# Altium PCB Base.PcbDoc
Units mm, origin at the board's own origin, x right, y up, seen from the top; angles counter-clockwise.
Board outline 38 x 18.7 mm, 2 copper layers (Top Layer, Bottom Layer), stack 1.671 mm thick; 41 components, 35 nets, 177 pads, 47 vias.
Unrouted connection lines stored in the file: 1.
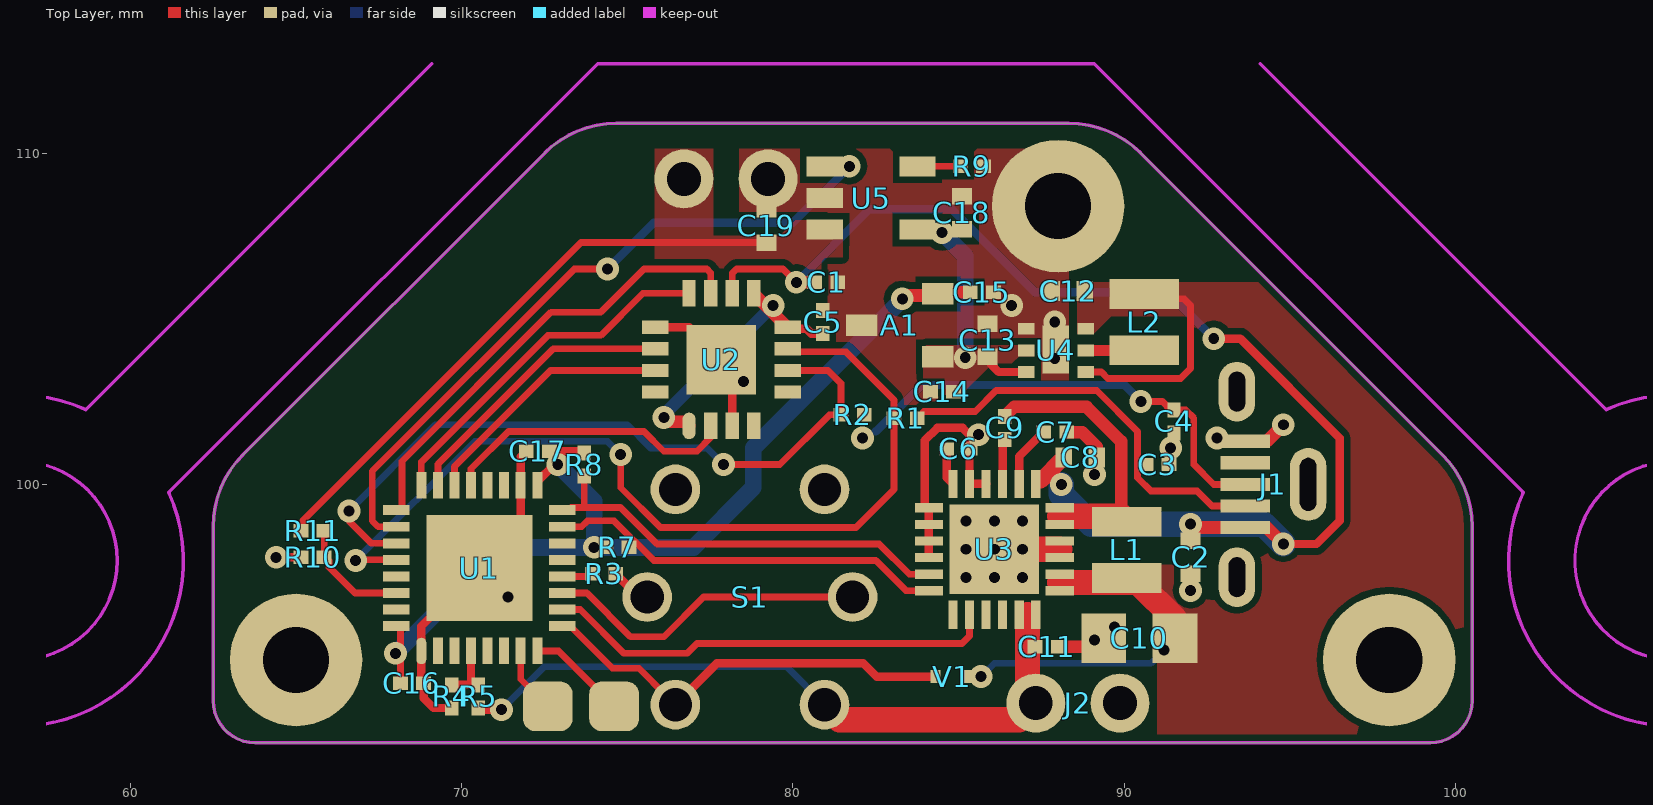
[diagram p0: Top Layer view]
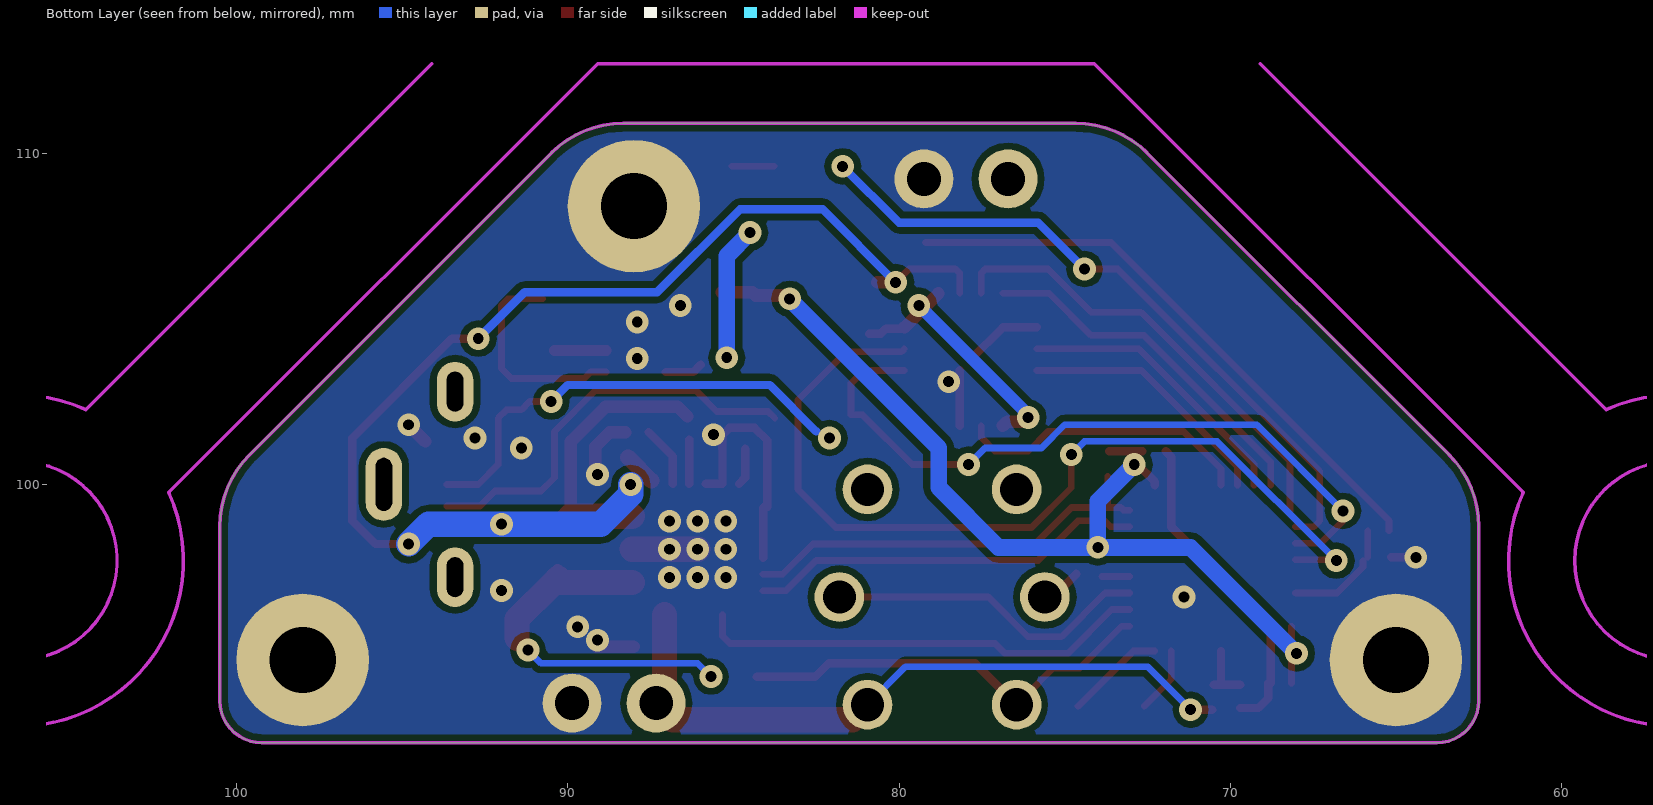
[diagram p1: Bottom Layer view, seen from below]

## Layer stack, top to bottom
Top Layer: signal copper 0.0356
Dielectric: core 1.6, FR-4, Dk 4.8
Bottom Layer: signal copper 0.0356

## Board outline
62.5,93.47 62.5,98.73 cw(c65.566,98.73) 63.398,100.898 72.502,110.002 cw(c74.67,107.834) 74.67,110.9 88.33,110.9 cw(c88.33,107.834) 90.498,110.002 99.602,100.898 cw(c97.434,98.73) 100.5,98.73 100.5,93.47 cw(c99.23,93.47) 99.23,92.2 63.77,92.2 cw(c63.77,93.47)

## Design rules (kind name [scope] priority, off if disabled: settings)
Clearance [All] p1: gap=0.2
PolygonConnect [All] p1: connectstyle=Direct reliefconductorwidth=0.254 reliefentries=4 polygonreliefangle="90 Angle"
RoutingVias [All] p1: holewidth=0.711 width=1.27 viastyle="Through Hole" minholewidth=0.711 minwidth=1.27 maxholewidth=0.711 maxwidth=1.27
SilkscreenOverComponentPads [All] p1: minsilkscreentomaskgap=0.254
SolderMaskExpansion [All] p1: expansion=0.102
Width [All] p1: maxlimit=2.54 minlimit=0.2 preferedwidth=0.203
27 further rules are at their usual default settings.

## Components (designator, comment, footprint, x,y, rotation, side; value= is the part's Value field where it differs from the comment)
A1 "AP7313-33SA" SOT23 84.375,103.85 r180 top
C1 "Cap 100nF" "0201 (C)" 81,106.1 r0 top
C2 "Cap 4.7µF" "0402 (C)" 92,97.8 r270 top
C3 "Cap 47pF" "0201 (C)" 91,100.6 r0 top
C4 "Cap 47pF" "0201 (C)" 91.5,101.9 r270 top
C5 "Cap 100nF" "0201 (C)" 80.9,104.9 r90 top
C6 "Cap 1µF" "0201 (C)" 84.991,101.07 r180 top
C7 "Cap 1µF" "0201 (C)" 87.912,101.578 r180 top
C8 "Cap 2.2µF" "0402 (C)" 88.674,100.816 r180 top
C9 "Cap 33nF" "0201 (C)" 86.388,101.705 r90 top
C10 "Cap 22µF" "0805 (C)" 90.452,95.355 r180 top
C11 "Cap 1µF" "0201 (C)" 87.658,95.101 r0 top
C12 "Cap 2.2µF" "0402 (C)" 88.306,105.836 r180 top
C13 "Cap 4.7µF" "0402 (C)" 85.875,104.35 r90 top
C14 "Cap 1µF" "0201 (C)" 84.5,102.8 r180 top
C15 "Cap 1µF" "0201 (C)" 85.7,105.8 r0 top
C16 "Cap 100nF" "0201 (C)" 68.5,94 r0 top
C17 "Cap 100nF" "0201 (C)" 72.3,101 r0 top
C18 "Cap 4.7µF" "0402 (C)" 85.1,108.2 r90 top
C19 "Cap 4.7µF" "0402 (C)" 79.2,107.8 r90 top
J1 "USB" "MICRO USB RECEPTACLE VERTICAL" 93.4,100 r90 top
J2 "Battery" "Conn 2-Pos 2.54mm Pitch" 88.6,93.4 r0 top
L1 "L 1µH" "INDUCTOR 2X2.5MM" 90.071,98.022 r270 top
L2 "L 1µH" "INDUCTOR 2X2.5MM" 90.6,104.9 r90 top
R1 "Res 27R" "0201 (R)" 83.4,102 r180 top
R2 "Res 27R" "0201 (R)" 81.8,102.1 r180 top
R3 "Res 100R" "0201 (R)" 74.3,97.3 r180 top
R4 "Res 10k" "0201 (R)" 69.7,93.6 r90 top
R5 "Res 10k" "0201 (R)" 70.5,93.6 r270 top
R7 "Res 4k7" "0201 (R)" 74.7,98.1 r0 top
R8 "Res 4k7" "0201 (R)" 73.7,100.6 r270 top
R9 "Res 2k2" "0201 (R)" 85.4,109.6 r180 top
R10 "Res 10k" "0201 (R)" 65.5,97.8 r180 top
R11 "Res 10k" "0201 (R)" 65.5,98.6 r180 top
S1 "ITS13FV1" "SWITCH THROUGH-HOLE" 78.7,96.6 r0 top
U1 "Xmega32E5" "QFN-32 (5X5MM)" 68.782,94.972 r90 top
U2 "FT230X" "QFN-16 (4X4MM)" 76.864,101.766 r90 top
U3 "bq24250" "QFN-24 (4X4MM)" 84.102,99.292 r0 top
U4 "FAN4860UMP5X" 6-UMLP 87.036,104.693 r0 top
U5 "MCP73831" SOT-23-5 80.958,109.594 r0 top
V1 "1N4148W" SOD923 84.8,94.2 r180 top

## Footprints (in the part's own frame and the unit in brackets; to place one, negate y for a bottom-side part, rotate by r counter-clockwise, add the part's x,y. Pads: shape width x height; smd on the part's side, far side on the other; paste and mask are expansions set on the pad)
6-UMLP [mm]
  rect 0.5x0.35 smd: 1(0,0) 2(0,-0.65) 3(0,-1.3) 4(1.8,-1.3) 5(1.8,-0.65) 6(1.8,0)
  rect 0.8x1.45 smd: 1(0.9,-0.625)
  body extent -0.1,-1.65 1.9,0.35, height 0.55
"0201 (C)" [mm]
  rect 0.45x0.4 smd: 1(-0.35,0) 2(0.35,0)
  body extent -0.35,-0.15 0.35,0.15, height 0.3
"0201 (R)" [mm]
  rect 0.45x0.4 smd: 1(-0.35,0) 2(0.35,0)
  body extent -0.35,-0.15 0.35,0.15, height 0.3
"0402 (C)" [mm]
  rect 0.5x0.6 smd: 1(-0.5,0) 2(0.5,0)
  body extent -0.5,-0.25 0.5,0.25, height 0.41
"0805 (C)" [mm] "Chip Resistor, 2-Leads, Body 2.0x1.3mm, IPC Low Density"
  rect 1.35x1.5 smd: 1(-1.075,0) 2(1.075,0)
  body extent -1.07,-0.7 1.08,0.7, height 1
"Conn 2-Pos 2.54mm Pitch" [mil]
  round 70 hole 40: 1(-50,0) 2(50,0)
  body extent -100,126 100,254, height 256
"INDUCTOR 2X2.5MM" [mm]
  rect 0.9x2.1 smd: 1(-0.85,0) 2(0.85,0)
  body extent -1.25,-1 1.25,1, height 1.2
"MICRO USB RECEPTACLE VERTICAL" [mm]
  rect 0.4x1.5 smd: 1(-1.3,-0.25) 2(-0.65,-0.25) 3(0,-0.25) 4(0.65,-0.25) 5(1.3,-0.25)
  oval 1.8x1.1 hole 0.5 slot 1.2 at 0 deg: ""(-2.8,0) ""(2.8,0)
  oval 2.2x1.1 hole 0.5 slot 1.6 at 0 deg: ""(0,-2.15)
  body extent -4,-2.6 4,0.4, height 6.7
"QFN-16 (4X4MM)" [mm]
  oval 0.8x0.4 smd: 1(0,0)
  rect 0.8x0.4 smd: 2(0,-0.65) 3(0,-1.3) 4(0,-1.95) 9(4,-1.95) 10(4,-1.3) 11(4,-0.65) 12(4,0)
  rect 0.4x0.8 smd: 5(1.025,-2.975) 6(1.675,-2.975) 7(2.325,-2.975) 8(2.975,-2.975) 13(2.975,1.025) 14(2.325,1.025) 15(1.675,1.025) 16(1.025,1.025)
  rect 2.1x2.1 smd: 17(2,-0.975)
  body extent 0,-2.97 4,1.03, height 0.85
"QFN-24 (4X4MM)" [mm]
  rect 0.85x0.28 smd: 1(0,0) 2(0,-0.5) 3(0,-1) 4(0,-1.5) 5(0,-2) 6(0,-2.5) 13(3.95,-2.5) 14(3.95,-2) 15(3.95,-1.5) 16(3.95,-1) 17(3.95,-0.5) 18(3.95,0)
  rect 2.7x2.7 smd: 4(1.975,-1.25)
  rect 0.28x0.85 smd: 7(0.725,-3.225) 8(1.225,-3.225) 9(1.725,-3.225) 10(2.225,-3.225) 11(2.725,-3.225) 12(3.225,-3.225) 19(3.225,0.725) 20(2.725,0.725) 21(2.225,0.725) 22(1.725,0.725) 23(1.225,0.725) 24(0.725,0.725)
  body extent -0.02,-3.25 3.98,0.75, height 1
"QFN-32 (5X5MM)" [mm]
  rect 3.2x3.2 smd: 0(2.5,-1.75)
  oval 0.8x0.3 smd: 1(0,0)
  rect 0.8x0.3 smd: 2(0,-0.5) 3(0,-1) 4(0,-1.5) 5(0,-2) 6(0,-2.5) 7(0,-3) 8(0,-3.5) 17(5,-3.5) 18(5,-3) 19(5,-2.5) 20(5,-2) 21(5,-1.5) 22(5,-1) 23(5,-0.5) 24(5,0)
  rect 0.3x0.8 smd: 9(0.75,-4.25) 10(1.25,-4.25) 11(1.75,-4.25) 12(2.25,-4.25) 13(2.75,-4.25) 14(3.25,-4.25) 15(3.75,-4.25) 16(4.25,-4.25) 25(4.25,0.75) 26(3.75,0.75) 27(3.25,0.75) 28(2.75,0.75) 29(2.25,0.75) 30(1.75,0.75) 31(1.25,0.75) 32(0.75,0.75)
  body extent 0,-4.25 5,0.75, height 0.55
SOD923 [mm]
  rect 0.3x0.4 smd: A(0.5,0) K(-0.5,0)
  body extent -0.42,-0.3 0.43,0.3, height 0.38
SOT23 [mm]
  rect 0.95x0.65 smd: 1(0,0) 2(0,-1.9) 3(2.3,-0.95)
  body extent -0.05,-2.4 2.35,0.5, height 1.3
SOT-23-5 [mm]
  rect 1.1x0.6 smd: 1(0,0) 2(0,-0.95) 3(0,-1.9) 4(2.8,-1.9) 5(2.8,0)
  body extent 0,-2.47 2.8,0.58, height 1.4
"SWITCH THROUGH-HOLE" [mm]
  round 1.5 hole 1: 1(2.25,3.25) 2(2.25,-3.25) 3(-2.25,3.25) 4(-2.25,-3.25) L1(3.1,0) L2(-3.1,0)
  body extent -3.97,-3.99 4,3.99, height 11.95

## Part data
A1: "Low Dropout Regulator 3.3V, 150mA"
C1 C5 C16 C17: "Ceramic Capacitor 100nF"
C2 C13 C18 C19: "Ceramic Capacitor 4.7µF"
C3 C4: "Ceramic Capacitor 47pF"
C6 C7 C11 C14 C15: "Ceramic Capacitor 1µF"
C8 C12: "Ceramic Capacitor 2.2µF"
C9: "Ceramic Capacitor 33nF"
C10: "Ceramic Capacitor 22µF"
J1: library part "Micro USB", "Micro USB Type B Receptacle"
J2: library part "Connector 2-Pos", "Connector 2-Pos 2.54mm Pitch"
L1 L2: "Inductor 1µH"
R1 R2: "Resistor 27R"
R3: "Resistor 100R"
R4 R5 R10 R11: "Resistor 10k"
R7 R8: "Resistor 4k7"
R9: "Resistor 2k2"
S1: "Through-Hole Tactile Switch"
U1: "8-Bit AVR Microcontroller"
U2: "USB-UART Bridge"
U3: "LiPo Chargering Regulator with Step-Down Converter"
U4: "Boost Converter 5V"
U5: "500mA Linear LiPo Charger"
V1: library part Diode, "Diode"

## Free pads (board coordinates)
  round 4 hole 2 unplated: ""(65,94.7) ""(88,108.4) ""(98,94.7)
  rrect50% 1.5x1.5 smd: ""(72.6,93.3) ""(74.6,93.3)
  round 1.778 hole 1.016: ""(76.708,109.22) ""(79.248,109.22)

## Via types
v1: diameter 0.686, hole 0.33, Top Layer to Bottom Layer, tented both sides, 47 vias

## Nets (pads, with @x,y where several pads share a name; then routed paths per layer and width w, separated by ;. In a path a pad name is that pad's centre, name@x,y a point inside that pad or via, vN(x,y) a via of type N, cw(c..) or ccw(c..) an arc to the next point about the centre after c; other vN are vias at no path point)
+3.3V: A1.2 C15.1 C16.1 C17.2 R7.1 R8.1 U1.17 U1.32 | length 28.9
  Top Layer w0.203: C16.1 U1.32@68.15,95.722
  Top Layer w0.254: U1.17 72.282,100.082 v1@72.8,100.6 ; C17.2 R8.1@73.65,101
  Top Layer w0.381: v1@83.4,105.7 84.325,105.7 A1.2 ; A1.2@84.425,105.8 C15.1
  Bottom Layer w0.508: v1(68,94.9) 71.2,98.1 v1(74,98.1) ; v1(72.9,100.6) 74,99.5 v1(74,98.1) ; v1(83.3,105.6) 78.8,101.1 78.8,99.9 77,98.1 v1(74,98.1)
+5V: A1.1 C13.1 C14.1 C18.1 U4.2 U4.3 U5.4 | length 5.2
  Top Layer w0.254: C13.1@85.987,103.613 86.207,103.393 U4.3
  Bottom Layer w0.508: v1(84.5,107.6) 85.2,106.9 v1(85.2,103.825)
GND: A1.3 C1.2 C2.2 C3.2 C4.2 C5.2 C6.1 C7.1 C8.1 C10.2 C11.2 C12.2 C13.2 C14.2 C15.2 C16.2 C17.1 C18.2 C19.2 J1.5 J2.2 pad.@65,94.7 pad.@79.248,109.22 pad.@88,108.4 pad.@98,94.7 R4.1 R9.1 R10.2 U1.0 U1.1 U1.18 U2.3 U2.13 U2.17 U3.1 U3.2 U3.3 U3.4 U3.15 U3.16 U3.22 U3.23 U4.1 U5.2 | length 27.8
  Top Layer w0.254: v1(64.4,97.8) R10.2 ; C16.2@68.782,94 U1.1 68.782,95.722 U1.0 71.782,98.722 U1.18 71.782,100.832 C17.1 ; C16.2 68.85,93.55 69.15,93.25 R4.1 ; U2.13 76.864,104.741 U2.17 ; U2.3 U2.17@78.164,103.441 ; U3.1@83.975,99.305 83.975,101.324 84.356,101.705 85.118,101.705 85.341,101.482 C6.1 ; U3.1@84.089,99.305 U3.1 U3.2 U3.3 U3.4@84.102,97.792 ; C6.1@85.327,101.056 U3.23 U3.22 ; U3.15 88.052,98.042 U3.16
  Top Layer w0.381: C11.2 C10.2@89.123,95.101 ; C7.1 88.728,101.578 89.174,101.132 C8.1 v1@89.174,100.374 ; J1.5@94.3,101.3 v1(94.8,101.8)
  Top Layer w0.762: v1(86.077,98.042) 88.052,98.042
  other v1: 89.1,95.3 89.7,95.7 71.4,96.6 92,96.8 85.227,97.192 86.077,97.192 86.927,97.192 85.227,98.042 86.927,98.042 85.227,98.892 86.077,98.892 86.927,98.892 89.1,100.3 91.4,101.1 92.8,101.4 85.6,101.5 78.5,103.1 87.9,103.8 87.9,104.9 86.6,105.4
NetC3_1: C3.1 J1.2 R1.1 | length 12.5
  Top Layer w0.203: R1.1 83.95,102.2 85.5,102.2 86.132,102.832 89.168,102.832 90.4,101.6 90.4,100.2 90.8,99.8 92.2,99.8 92.65,99.35 J1.2
NetC4_1: C4.1 J1.3 R2.1 | length 13.8
  Top Layer w0.203: v1(90.5,102.5) 91.15,102.5 91.4,102.25 91.85,102.25 92.1,102 92.1,100.6 92.7,100 J1.3
  Bottom Layer w0.254: 82.5,101.6 83.9,103 90,103 v1(90.5,102.5)
  other v1: 82.1,101.4
NetC5_1: C5.1 U2.1 U2.8 U2.9 | length 7.9
  Top Layer w0.254: U2.8@79.88,104.7 80.4,104.7 80.55,104.55 C5.1
  Top Layer w0.381: v1@76.229,101.893 76.737,101.893 U2.1 ; U2.9 U2.8
  Bottom Layer w0.381: v1@76.061,102.061 v1(79.4,105.4)
  other v1: 76.102,102.02
NetC6_2: C6.2 U3.24 | length 1.1
  Top Layer w0.254: C6.2 84.641,100.203 U3.24
NetC7_2: C7.2 U3.20 | length 1.9
  Top Layer w0.254: U3.20 86.827,100.843 C7.2
NetC9_1: C9.1 U3.21 | length 1.3
  Top Layer w0.254: U3.21 C9.1@86.327,101.355
NetC9_2: C9.2 L1.1 U3.17 U3.18 | length 8.9
  Top Layer w0.254: U3.17 88.052,99.038 U3.18
  Top Layer w0.381: C9.2 86.673,102.34 88.86,102.34 89.905,101.295 L1.1@89.905,99.038
  Top Layer w0.762: 88.052,99.038 89.905,99.038 L1.1
NetL2_1: L2.1 U4.5 | length 1.6
  Top Layer w0.33: U4.5 L2.1@90.392,104.043
NetR1_2: R1.2 U1.28 U2.7 | length 27.7
  Top Layer w0.203: v1@66.8,97.722 U1.28 ; v1(74.8,100.9) 74.8,99.9 76,98.7 81.9,98.7 83.05,99.85 R1.2 83.05,102.55 81.6,104 79.93,104 U2.7
  Bottom Layer w0.203: v1(66.8,97.7) 70.4,101.3 74.4,101.3 v1(74.8,100.9)
NetR2_2: R2.2 U1.27 U2.6 | length 21.5
  Top Layer w0.203: v1@66.6,98.9 67.278,98.222 U1.27 ; v1(77.9,100.6) 79.6,100.6 81.1,102.1 R2.2 81.45,103.05 81.059,103.441 U2.6
  Bottom Layer w0.203: v1(66.6,99.2) 69.2,101.8 75,101.8 75.7,101.1 77.4,101.1 v1(77.9,100.6)
NetR3_1: R3.1 S1.L2 | length 1.5
  Top Layer w0.254: R3.1 S1.L2@75.35,96.6 ; S1.L2@75.25,96.25 S1.L2
NetR3_2: R3.2 U1.12 | length 0.8
  Top Layer w0.203: U1.12 R3.2@73.872,97.222
NetR4_2: R4.2 R5.1 U1.4 | length 1.8
  Top Layer w0.254: R4.2 70.282,93.95 ; U1.4 70.282,93.95 ; R5.1 70.282,93.95
NetR7_2: R7.2 U1.15 U3.6 | length 12
  Top Layer w0.203: U1.15 73.622,98.722 73.8,98.9 74.6,98.9 75.8,97.7 82.5,97.7 83.408,96.792 U3.6
NetR8_2: R8.2 U1.16 U3.5 | length 12.9
  Top Layer w0.203: U1.16 73.222,99.222 73.303,99.303 73.7,99.303 ; R8.2 73.7,99.303 ; U3.5 83.508,97.292 82.6,98.2 75.9,98.2 74.797,99.303 73.7,99.303
NetR9_2: R9.2 U5.5 | length 1.3
  Top Layer w0.203: U5.5@83.764,109.6 R9.2
NetR10_1: R10.1 R11.1 U1.30 | length 3.4
  Top Layer w0.203: R10.1 R11.1 ; R10.1@65.998,97.698 65.998,97.502 66.778,96.722 U1.30
NetS1_4: S1.4 U1.9 V1.A | length 12.6
  Top Layer w0.203: U1.9 73.278,95.722 74.55,94.45 75.35,94.45 S1.4@76.2,93.6
  Top Layer w0.254: S1.4 77.7,94.6 82.125,94.6 82.525,94.2 V1.A
NetS1_L1: S1.L1 U1.11 | length 9.8
  Top Layer w0.203: U1.11 73.778,96.722 75.1,95.4 76.1,95.4 77.3,96.6 S1.L1
NetU1_10: U1.10 U3.8 | length 13.7
  Top Layer w0.203: U1.10 73.578,96.222 74.9,94.9 76.8,94.9 77.1,95.2 85.1,95.2 85.327,95.427 U3.8
NetU1_21: U1.21 U2.2 | length 9
  Top Layer w0.203: U1.21 70.282,100.471 71.411,101.6 75.5,101.6 76.098,101.002 77.102,101.002 77.514,101.414 U2.2
NetU1_22: U1.22 U2.15 | length 7.8
  Top Layer w0.203: U1.22 69.782,100.542 72.681,103.441 U2.15
NetU1_23: U1.23 U2.14 | length 8.6
  Top Layer w0.203: U1.23 69.282,100.612 72.761,104.091 U2.14
NetU1_24: U1.24 U2.12 | length 10.9
  Top Layer w0.203: U1.24 68.782,100.682 72.6,104.5 74.2,104.5 75.466,105.766 U2.12
NetU1_25: U1.25 U2.11 | length 13.9
  Top Layer w0.203: U1.25@68.2,99.2 68.2,100.7 72.7,105.2 74.2,105.2 75.5,106.5 77.4,106.5 77.514,106.386 U2.11
NetU1_26: U1.26 U5.1 | length 20.5
  Top Layer w0.203: U1.26 67.478,98.722 67.3,98.9 67.3,100.4 73.4,106.5 v1(74.4,106.5)
  Bottom Layer w0.254: v1(74.4,106.5) 75.8,107.9 80,107.9 v1(81.7,109.6)
PDI_CLK: pad.@74.6,93.3 U1.8 | length 3
  Top Layer w0.203: U1.8 72.928,94.972 pad.@74.6,93.3
PDI_DATA: pad.@72.6,93.3 U1.7 | length 2
  Top Layer w0.203: U1.7 71.782,94.118 pad.@72.6,93.3
V_BAT: C11.1 J2.1 R5.2 S1.2 U3.11 U3.12 | length 21.4
  Top Layer w0.254: R5.2@70.55,93.2 v1(71.2,93.2) ; U3.11 87.077,96.067 U3.12
  Top Layer w0.762: S1.2 81.4,92.9 86.83,92.9 J2.1 ; J2.1@87.077,93.4 87.077,96.067
  Bottom Layer w0.203: v1(71.2,93.2) 72.5,94.5 79.8,94.5 S1.2
V_DEVICE: C19.1 pad.@76.708,109.22 R11.2 U5.3 | length 17.8
  Top Layer w0.203: R11.2@65.212,98.6 65.212,98.912 73.6,107.3 C19.1
V_SYS: C10.1 C12.1 L1.2 L2.2 U3.13 U3.14 U4.4 U4.6 V1.K | length 18
  Top Layer w0.203: U4.4 89.307,103.393 89.5,103.2 91.7,103.2 92,103.5 92,105.4 91.8,105.6 L2.2@90.75,105.6
  Top Layer w0.254: U3.13 88.052,97.042 U3.14
  Top Layer w0.381: L1.2 L1.2@90.299,97.4
  Top Layer w0.762: 88.052,97.042 L1.2@90.416,97.042 ; L1.2@90.286,97.172 L1.2@90.416,97.042 ; C10.1 91.527,95.931 L1.2@90.416,97.042
  Bottom Layer w0.203: v1(85.675,94.2) 86.075,94.6 90.8,94.6 v1(91.2,95)
V_USB: C1.1 C2.1 C8.2 J1.1 U2.10 U3.19 | length 39.4
  Top Layer w0.203: U2.10 78.164,106.364 78.3,106.5 79.7,106.5 v1(80.1,106.1)
  Top Layer w0.254: v1(92.7,104.4) 93.5,104.4 96.5,101.4 96.5,98.9 95.8,98.2 v1(94.8,98.2)
  Top Layer w0.381: v1(80.1,106.1) C1.1 ; v1@92,98.7 J1.1 ; J1.1@94.3,98.7 v1(94.8,98.2)
  Top Layer w0.483: 87.471,100.113 C8.2 ; 87.758,100.342 v1(88.1,100)
  Bottom Layer w0.254: v1(80.1,106.1) 82.3,108.3 84.8,108.3 87.3,105.8 91.3,105.8 v1(92.7,104.4)
  Bottom Layer w0.762: v1(88.1,100) 88.1,99.7 89,98.8 v1(92,98.8) 94.2,98.8 v1(94.8,98.2)
pads on no net: J1. J1.4 S1.1 S1.3 U1.2 U1.3 U1.5 U1.6 U1.13 U1.14 U1.19 U1.20 U1.29 U1.31 U2.4 U2.5 U2.16 U3.7 U3.9 U3.10

## Polygon pours and split planes (outlines as drawn)
GND on Top Layer "Bottom Layer-No Net" (solid, remove dead copper, pour order 6): 88.325,101.85 88.325,110.125 78.375,110.125 78.375,108.225 81.05,108.225 81.05,101.85
V_DEVICE on Top Layer "Bottom Layer-No Net" (solid, remove dead copper, pour order 12): 81.5,107.975 81.5,106.4 75.825,106.4 75.825,110.125 77.6,110.125 77.6,107.5 79.6,107.5 80.075,107.975
V_SYS on Top Layer "Bottom Layer-No Net" (solid, remove dead copper, pour order 2): 88.575,104.55 88.575,106.1 100.5,106.1 100.5,92.225 91,92.2 91,97.575 93.4,97.575 93.4,103.575 92,103.575 92,105.075 89.6,105.075 89.075,104.55
+5V on Top Layer "Bottom Layer-No Net" (solid, remove dead copper, pour order 4): 87.275,104.2 87.275,103.875 86.825,103.875 86.6,103.65 86.025,103.65 85.075,102.7 83.925,102.7 83.925,104.2
GND on Bottom Layer "Bottom Layer-No Net" (solid, remove dead copper, pour order 7): 62.5,92.2 100.5,92.2 100.5,100 89.6,110.9 73.4,110.9 62.5,100

## Keep-outs
Keep-Out Layer:
  circle w0.102: c106.6,97.7 r3
  circle w0.102: c56.6,97.7 r3
  lines w0.102: 58.631,102.269 ccw(c56.6,97.7) 61.169,99.731 ; 58.65,102.25 69.1,112.7 ; 61.15,99.75 74.1,112.7 89.1,112.7 102.05,99.75 ; 94.1,112.7 104.55,102.25 ; 102.031,99.731 ccw(c106.6,97.7) 104.569,102.269 ; 62.5,93.47 ccw(c63.77,93.47) 63.77,92.2 99.23,92.2 ccw(c99.23,93.47) 100.5,93.47 100.5,98.73 ccw(c97.434,98.73) 99.602,100.898 90.498,110.002 ccw(c88.33,107.834) 88.33,110.9 74.67,110.9 ccw(c74.67,107.834) 72.502,110.002 63.398,100.898 ccw(c65.566,98.73) 62.5,98.73 62.5,93.47

## Silkscreen, mask and mechanical layers (free items; w line width, h text height)
Board Outline:
  lines w0.254: 62.5,92.2 100.5,92.2 100.5,100 89.6,110.9 73.4,110.9 62.5,100 62.5,92.2
Mechanical Drawing:
  circle w0.254: c78.698,96.6 r2.375
  lines w0.254: 92.9,96 96,96 96,104 92.9,104 92.9,96
  text "2" at 85.8,106.9 h1.02
  text "5" at 94.1,99.3 h1.02
  text "4" at 80.8,98.8 h1.02
  text "1" at 66.5,93.6 h1.02
  text "3" at 95.9,92.9 h1.02

## Dimensions
73.4,110.9 to 89.981,110.9 on Mechanical Drawing
89.6,110.9 to 88,108.4 on Mechanical Drawing
89.6,110.9 to 88,108.4 on Mechanical Drawing
92.9,96 to 100.5,92.2 on Mechanical Drawing
96,96 to 100.5,100 on Mechanical Drawing
81.073,96.6 to 0,0 on Mechanical Drawing
92.9,96 to 96,96 on Mechanical Drawing
92.9,104 to 92.9,96 on Mechanical Drawing
78.698,96.6 to 62.5,92.2 on Mechanical Drawing
78.698,96.6 to 62.5,92.2 on Mechanical Drawing
62.5,100 to 62.5,92.2 on Mechanical Drawing
65,94.7 to 62.5,92.2 on Mechanical Drawing
98,94.7 to 100.5,92.2 on Mechanical Drawing
98,94.7 to 100.5,92.2 on Mechanical Drawing
65,94.7 to 62.5,92.2 on Mechanical Drawing
100.5,92.2 to 100.5,100 on Mechanical Drawing
73.4,110.9 to 58.8,110.9 on Mechanical Drawing
62.5,92.2 to 73.4,110.9 on Mechanical Drawing
62.5,92.2 to 100.5,92.2 on Mechanical Drawing